# EAGLE board SparkFun_CAN-Bus_Shield_Panel_v13 (EAGLE 7.3.0), part 1 of 2
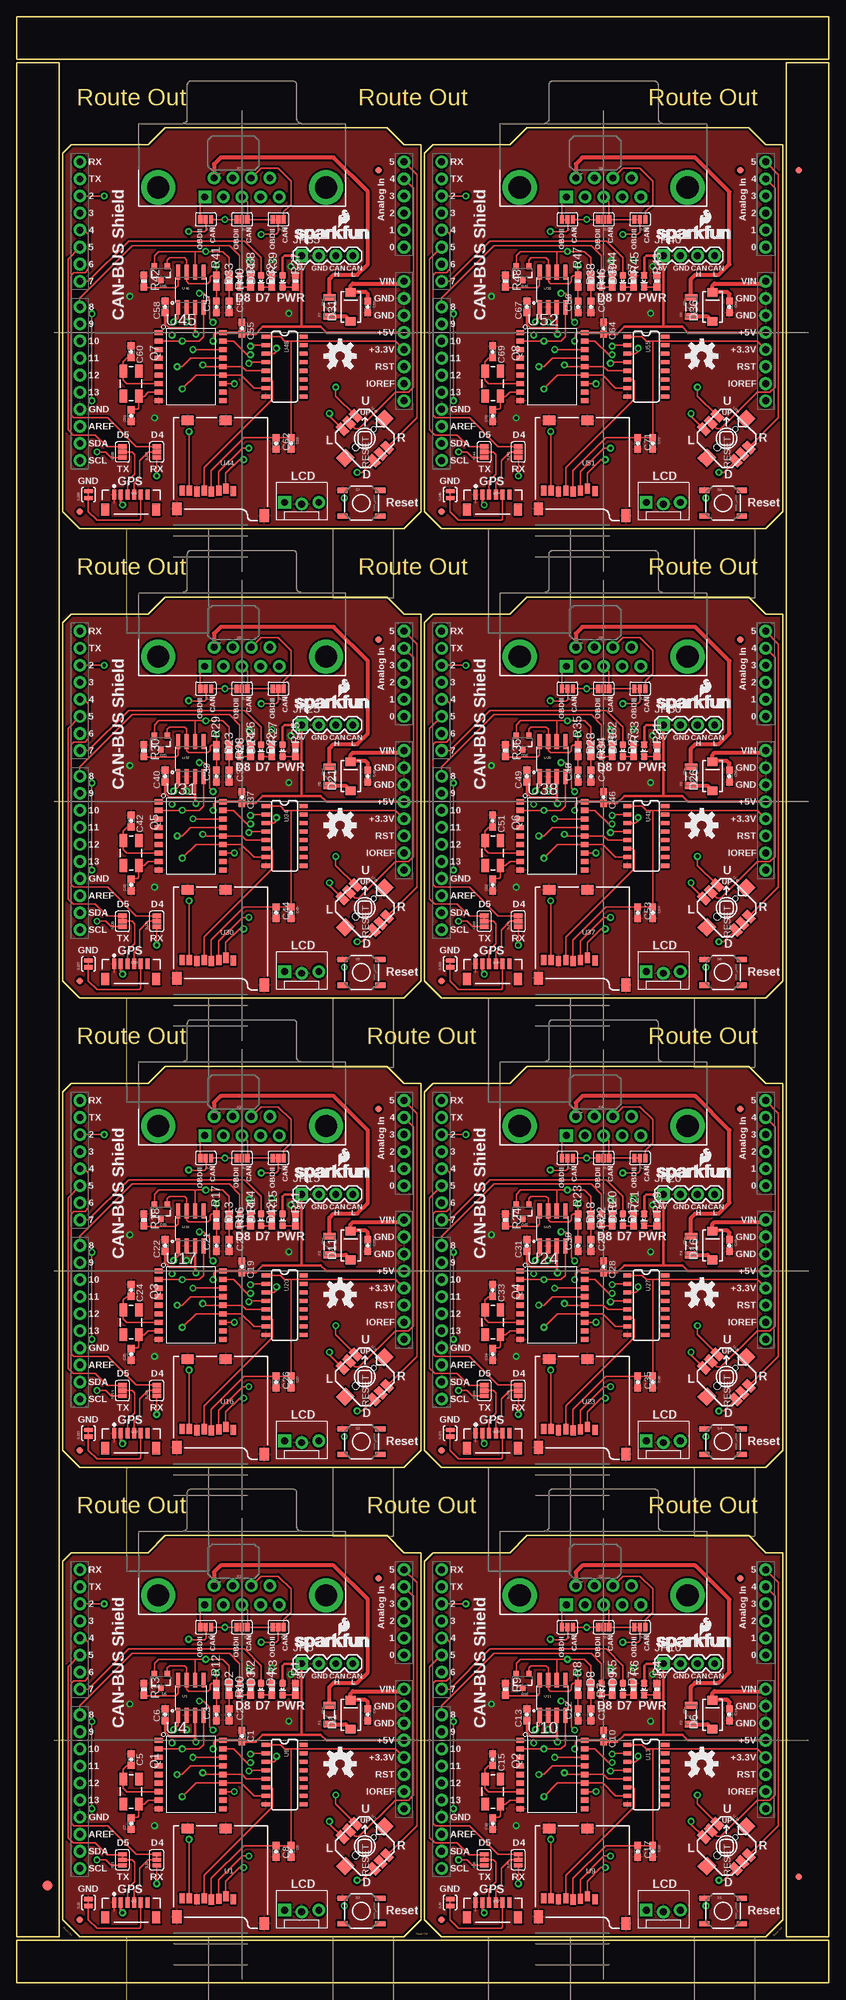
[diagram p0: board, top side]
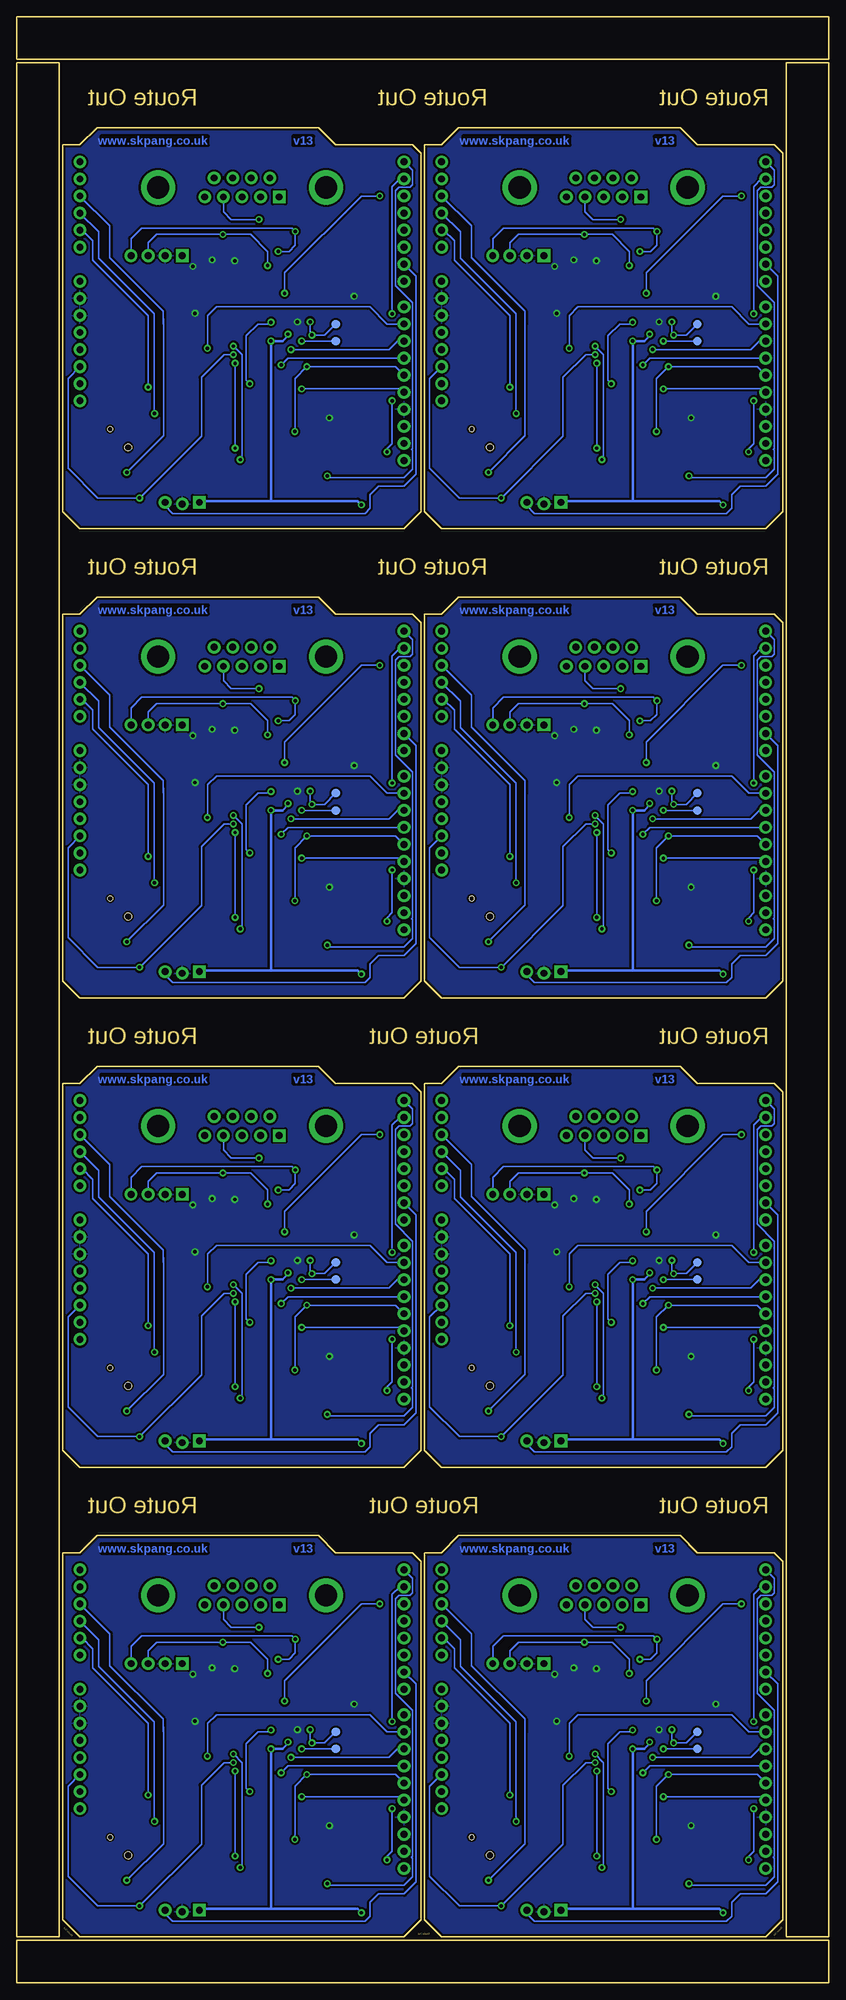
[diagram p1: board, bottom side, seen from below]

Size 120.9 x 292.61 mm. Coordinates in mm from the lower left corner, seen from the top.
Outline: 79.25,286.26 0,286.26 0,292.61 29.72,292.61
Outline: 25.91,292.61 120.9,292.61 120.9,286.26 75.44,286.26
Outline: 6.86,9.4 6.86,62.74 8.13,64.01 19.56,64.01 22.1,66.55 55.12,66.55 57.66,64.01 60.2,64.01 60.2,9.4 57.66,6.86 9.4,6.86 6.86,9.4
Outline: 60.71,9.4 60.71,62.74 61.98,64.01 73.41,64.01 75.95,66.55 108.97,66.55 111.51,64.01 114.05,64.01 114.05,9.4 111.51,6.86 63.25,6.86 60.71,9.4
Outline: 6.86,79.25 6.86,132.59 8.13,133.86 19.56,133.86 22.1,136.4 55.12,136.4 57.66,133.86 60.2,133.86 60.2,79.25 57.66,76.71 9.4,76.71 6.86,79.25
Outline: 60.71,79.25 60.71,132.59 61.98,133.86 73.41,133.86 75.95,136.4 108.97,136.4 111.51,133.86 114.05,133.86 114.05,79.25 111.51,76.71 63.25,76.71 60.71,79.25
Outline: 6.86,149.1 6.86,202.44 8.13,203.71 19.56,203.71 22.1,206.25 55.12,206.25 57.66,203.71 60.2,203.71 60.2,149.1 57.66,146.56 9.4,146.56 6.86,149.1
Outline: 60.71,149.1 60.71,202.44 61.98,203.71 73.41,203.71 75.95,206.25 108.97,206.25 111.51,203.71 114.05,203.71 114.05,149.1 111.51,146.56 63.25,146.56 60.71,149.1
Outline: 6.86,218.95 6.86,272.29 8.13,273.56 19.56,273.56 22.1,276.1 55.12,276.1 57.66,273.56 60.2,273.56 60.2,218.95 57.66,216.41 9.4,216.41 6.86,218.95
Outline: 60.71,218.95 60.71,272.29 61.98,273.56 73.41,273.56 75.95,276.1 108.97,276.1 111.51,273.56 114.05,273.56 114.05,218.95 111.51,216.41 63.25,216.41 60.71,218.95
Outline: 6.35,6.86 6.35,285.75 0,285.75 0,6.86 6.35,6.86
Outline: 0,0 120.9,0 120.9,6.35 0,6.35 0,0
Outline: 114.55,6.86 120.9,6.86 120.9,285.75 114.55,285.75 114.55,6.86
Copper layers (1*16): Top 0.035mm / dielectric 1.5mm / Bottom 0.035mm
Design rules "SparkFun-2-layer": minimum track width 7mil, minimum drill 15mil, track to track 8mil, track to pad 8mil, pad to pad 8mil, via to via 8mil, smd to smd 8mil, copper to edge 8mil, drill to drill 8mil, minimum pad ring 12mil, minimum via ring 10mil, stop-mask expansion 4mil, vias tented up to drill 20mil, thermal gap 10mil
tRestrict: area 24,41.1 to 25.6,42.1; area 22.4,25.6 to 29.4,26.9; area 28.8,36.1 to 29.1,36.4; area 41.1,25.9 to 41.5,26.2; area 77.9,41.1 to 79.4,42.1; area 76.3,25.6 to 83.2,26.9; area 82.6,36.1 to 82.9,36.4; area 95,25.9 to 95.3,26.2; area 24,111 to 25.6,112; area 22.4,95.4 to 29.4,96.7; area 28.8,105.9 to 29.1,106.2; area 41.1,95.8 to 41.5,96.1; area 77.9,111 to 79.4,112; area 76.3,95.4 to 83.2,96.7; area 82.6,105.9 to 82.9,106.2; area 95,95.8 to 95.3,96.1; area 24,180.8 to 25.6,181.8; area 22.4,165.3 to 29.4,166.6; area 28.8,175.8 to 29.1,176.1; area 41.1,165.6 to 41.5,165.9; area 77.9,180.8 to 79.4,181.8; area 76.3,165.3 to 83.2,166.6; area 82.6,175.8 to 82.9,176.1; area 95,165.6 to 95.3,165.9; area 24,250.7 to 25.6,251.7; area 22.4,235.1 to 29.4,236.4; area 28.8,245.6 to 29.1,245.9; area 41.1,235.5 to 41.5,235.8; area 77.9,250.7 to 79.4,251.7; area 76.3,235.1 to 83.2,236.4; area 82.6,245.6 to 82.9,245.9; area 95,235.5 to 95.3,235.8

## Footprints (pad centres in the part's own frame; a part is rotated, then mirrored left to right if it is on the bottom)
0603-CAP = smd 1.1 x 1: 1 -0.85,0; 2 0.85,0
SMA-DIODE = smd 1.27 x 1.47: A -2.15,0; C 2.15,0
LED-0603 = smd 1 x 1: A 0,-0.877; C 0,0.877
SOT23-3 = smd 0.8 x 0.9: 1 -0.95,-1; 2 0.95,-1; 3 0,1.1
FIDUCIAL-1.5X3 = smd 1.5 x 1.5: 1 0,0
FIDUCIAL-1X2 = smd 1 x 1: 1 0,0
PTC-1206 = smd 1 x 1.8: 1 -1.4,0; 2 1.4,0
MOLEX-1X3_LOCK = drill 1.016 pad 1.88 square: 1 0,0.127 | drill 1.016 pad 1.88: 2 2.54,-0.127; 3 5.08,0.127
1X04 = drill 1.016 pad 1.88 square: 1 0,0 | drill 1.016 pad 1.88: 2 2.54,0; 3 5.08,0; 4 7.62,0
CRYSTAL-SMD-5X3 = smd 1.9 x 1.1: 1 -1.85,-1.15; 2 1.85,-1.15; 3 1.85,1.15; 4 -1.85,1.15
0603-RES = smd 1.1 x 1: 1 -0.85,0; 2 0.85,0
TACTILE-SWITCH-SMD = smd 1.524 x 0.762: 1 -2.794,1.905; 2 2.794,1.905; 3 -2.794,-1.905; 4 2.794,-1.905
PAD-JUMPER-3-2OF3_NC_BY_TRACE_YES_SILK_FULL_BOX = smd 0.635 x 1.27: 1 -0.813,0; 2 0,0; 3 0.813,0
PAD-JUMPER-2-NC_BY_TRACE_YES_SILK = smd 0.635 x 1.27: 1 -0.508,0; 2 0.508,0
PAD.03X.05 = smd 1.27 x 1.27: P$1 0,0
MICROSD_1:1 = smd 0.8 x 1.5: 1 5.096,10.919; 2 6.218,10.519; 3 7.274,10.853; 4 8.367,10.982; 5 9.421,10.828; 6 10.539,10.973; 7 11.648,10.819; 8 12.721,10.819 | smd 1.8 x 1.4: CD1 11.92,0.4; CD2 6.22,0.4 | smd 1.4 x 1.9: GND1 0.497,14.55; GND3 13.52,13.55
UNO_R3_SHIELD = drill 1.016 pad 1.88: 3.3V 50.8,26.67; 5V 50.8,29.21; A0 50.8,41.91; A1 50.8,44.45; A2 50.8,46.99; A3 50.8,49.53; A4 50.8,52.07; A5 50.8,54.61; AREF 2.54,15.24; D2 2.54,49.53; D3 2.54,46.99; D4 2.54,44.45; D5 2.54,41.91; D6 2.54,39.37; D7 2.54,36.83; D8 2.54,33.02; D9 2.54,30.48; D10 2.54,27.94; D11 2.54,25.4; D12 2.54,22.86; D13 2.54,20.32; GND@0 50.8,31.75; GND@1 50.8,34.29; GND@2 2.54,17.78; IOREF 50.8,21.59; NC 50.8,19.05; RES 50.8,24.13; RX 2.54,54.61; SCL 2.54,10.16; SDA 2.54,12.7; TX 2.54,52.07; VIN 50.8,36.83
JST-6-SMD-VERT-1.0MM = smd 0.6 x 1.55: 1 -2.54,1.27; 2 -1.54,1.27; 3 -0.54,1.27; 4 0.46,1.27; 5 1.46,1.27; 6 2.46,1.27 | smd 1.2 x 1.8: P$1 -3.84,-0.955; P$2 3.76,-0.955
SO-18W = smd 0.762 x 1.143: 1 -5.08,-4.788; 2 -3.81,-4.788; 3 -2.54,-4.788; 4 -1.27,-4.788; 5 0,-4.788; 6 1.27,-4.788; 7 2.54,-4.788; 8 3.81,-4.788; 9 5.08,-4.788; 10 5.08,4.788; 11 3.81,4.788; 12 2.54,4.788; 13 1.27,4.788; 14 0,4.788; 15 -1.27,4.788; 16 -2.54,4.788; 17 -3.81,4.788; 18 -5.08,4.788
SO08 = smd 0.61 x 2.21: 1 -1.905,-2.616; 2 -0.635,-2.616; 3 0.635,-2.616; 4 1.905,-2.616; 5 1.905,2.616; 6 0.635,2.616; 7 -0.635,2.616; 8 -1.905,2.616
SO016 = smd 0.6 x 1.2: 1 -4.445,-2.8; 2 -3.175,-2.8; 3 -1.905,-2.8; 4 -0.635,-2.8; 5 0.635,-2.8; 6 1.905,-2.8; 7 3.175,-2.8; 8 4.445,-2.8; 9 4.445,2.8; 10 3.175,2.8; 11 1.905,2.8; 12 0.635,2.8; 13 -0.635,2.8; 14 -1.905,2.8; 15 -3.175,2.8; 16 -4.445,2.8
JOYSTICK_MINI = smd 1.85 x 1.1: A -3.325,1.4; B 3.325,1.4; C -3.325,-1.4; CTR -3.325,0; D 3.325,-1.4; GND 3.325,0 | smd 1.9 x 2: NC 0,4.13; NC@0 0,-4.13 | hole 0.75: 0,1.9 | hole 1.05: 0,-1.9
DB9_MALE = drill 1.016 pad 1.88: 1 5.54,-1.42; 2 2.77,-1.42; 3 0,-1.42; 4 -2.77,-1.42; 6 4.15,1.42; 7 1.38,1.42; 8 -1.38,1.42; 9 -4.15,1.42 | drill 1.016 pad 1.88 square: 5 -5.54,-1.42 | drill 3.302 pad 5.08: G1 -12.5,0; G2 12.5,0

## Placement (x,y rotation side)
C1  0.1uF  [0603-CAP]  33.53,36.7 270 top
C2  560pF  [0603-CAP]  31.62,39.88 90 top
C3  560pF  [0603-CAP]  29.72,39.88 90 top
C4  4.7uF  [0603-CAP]  52.26,39.88 270 top
C5  22pF  [0603-CAP]  17.02,33.21 270 top
C6  0.1uF  [0603-CAP]  22.1,39.88 270 top
C7  22pF  [0603-CAP]  17.02,23.69 90 top
C8  0.1uF  [0603-CAP]  38.61,19.56 90 top
C9  1.0uF  [0603-CAP]  40.83,19.56 270 top
C10  0.1uF  [0603-CAP]  87.38,36.7 270 top
C11  560pF  [0603-CAP]  85.47,39.88 90 top
C12  560pF  [0603-CAP]  83.57,39.88 90 top
C13  0.1uF  [0603-CAP]  75.95,39.88 270 top
C14  4.7uF  [0603-CAP]  106.11,39.88 270 top
C15  22pF  [0603-CAP]  70.87,33.21 270 top
C16  22pF  [0603-CAP]  70.87,23.69 90 top
C17  0.1uF  [0603-CAP]  92.46,19.56 90 top
C18  1.0uF  [0603-CAP]  94.68,19.56 270 top
C19  0.1uF  [0603-CAP]  33.53,106.55 270 top
C20  560pF  [0603-CAP]  31.62,109.73 90 top
C21  560pF  [0603-CAP]  29.72,109.73 90 top
C22  0.1uF  [0603-CAP]  22.1,109.73 270 top
C23  4.7uF  [0603-CAP]  52.26,109.73 270 top
C24  22pF  [0603-CAP]  17.02,103.06 270 top
C25  22pF  [0603-CAP]  17.02,93.54 90 top
C26  0.1uF  [0603-CAP]  38.61,89.41 90 top
C27  1.0uF  [0603-CAP]  40.83,89.41 270 top
C28  0.1uF  [0603-CAP]  87.38,106.55 270 top
C29  560pF  [0603-CAP]  85.47,109.73 90 top
C30  560pF  [0603-CAP]  83.57,109.73 90 top
C31  0.1uF  [0603-CAP]  75.95,109.73 270 top
C32  4.7uF  [0603-CAP]  106.11,109.73 270 top
C33  22pF  [0603-CAP]  70.87,103.06 270 top
C34  22pF  [0603-CAP]  70.87,93.54 90 top
C35  0.1uF  [0603-CAP]  92.46,89.41 90 top
C36  1.0uF  [0603-CAP]  94.68,89.41 270 top
C37  0.1uF  [0603-CAP]  33.53,176.4 270 top
C38  560pF  [0603-CAP]  31.62,179.58 90 top
C39  560pF  [0603-CAP]  29.72,179.58 90 top
C40  0.1uF  [0603-CAP]  22.1,179.58 270 top
C41  4.7uF  [0603-CAP]  52.26,179.58 270 top
C42  22pF  [0603-CAP]  17.02,172.91 270 top
C43  22pF  [0603-CAP]  17.02,163.39 90 top
C44  0.1uF  [0603-CAP]  38.61,159.26 90 top
C45  1.0uF  [0603-CAP]  40.83,159.26 270 top
C46  0.1uF  [0603-CAP]  87.38,176.4 270 top
C47  560pF  [0603-CAP]  85.47,179.58 90 top
C48  560pF  [0603-CAP]  83.57,179.58 90 top
C49  0.1uF  [0603-CAP]  75.95,179.58 270 top
C50  4.7uF  [0603-CAP]  106.11,179.58 270 top
C51  22pF  [0603-CAP]  70.87,172.91 270 top
C52  22pF  [0603-CAP]  70.87,163.39 90 top
C53  0.1uF  [0603-CAP]  92.46,159.26 90 top
C54  1.0uF  [0603-CAP]  94.68,159.26 270 top
C55  0.1uF  [0603-CAP]  33.53,246.25 270 top
C56  560pF  [0603-CAP]  31.62,249.43 90 top
C57  560pF  [0603-CAP]  29.72,249.43 90 top
C58  0.1uF  [0603-CAP]  22.1,249.43 270 top
C59  4.7uF  [0603-CAP]  52.26,249.43 270 top
C60  22pF  [0603-CAP]  17.02,242.76 270 top
C61  22pF  [0603-CAP]  17.02,233.24 90 top
C62  0.1uF  [0603-CAP]  38.61,229.11 90 top
C63  1.0uF  [0603-CAP]  40.83,229.11 270 top
C64  0.1uF  [0603-CAP]  87.38,246.25 270 top
C65  560pF  [0603-CAP]  85.47,249.43 90 top
C66  560pF  [0603-CAP]  83.57,249.43 90 top
C67  0.1uF  [0603-CAP]  75.95,249.43 270 top
C68  4.7uF  [0603-CAP]  106.11,249.43 270 top
C69  22pF  [0603-CAP]  70.87,242.76 270 top
C70  22pF  [0603-CAP]  70.87,233.24 90 top
C71  0.1uF  [0603-CAP]  92.46,229.11 90 top
C72  1.0uF  [0603-CAP]  94.68,229.11 270 top
D1  MBRA140  [SMA-DIODE]  49.72,39.88 90 top
D2  GREEN  [LED-0603]  33.21,43.69 180 top
D3  GREEN  [LED-0603]  36.39,43.69 180 top
D4  RED  [LED-0603]  39.56,43.69 180 top
D5  PESD1CAN  [SOT23-3]  21.46,44.96 180 top
D6  MBRA140  [SMA-DIODE]  103.57,39.88 90 top
D7  RED  [LED-0603]  93.41,43.69 180 top
D8  GREEN  [LED-0603]  87.06,43.69 180 top
D9  GREEN  [LED-0603]  90.23,43.69 180 top
D10  PESD1CAN  [SOT23-3]  75.31,44.96 180 top
D11  MBRA140  [SMA-DIODE]  49.72,109.73 90 top
D12  RED  [LED-0603]  39.56,113.54 180 top
D13  GREEN  [LED-0603]  33.21,113.54 180 top
D14  GREEN  [LED-0603]  36.39,113.54 180 top
D15  PESD1CAN  [SOT23-3]  21.46,114.81 180 top
D16  MBRA140  [SMA-DIODE]  103.57,109.73 90 top
D17  RED  [LED-0603]  93.41,113.54 180 top
D18  GREEN  [LED-0603]  87.06,113.54 180 top
D19  GREEN  [LED-0603]  90.23,113.54 180 top
D20  PESD1CAN  [SOT23-3]  75.31,114.81 180 top
D21  MBRA140  [SMA-DIODE]  49.72,179.58 90 top
D22  RED  [LED-0603]  39.56,183.39 180 top
D23  GREEN  [LED-0603]  33.21,183.39 180 top
D24  GREEN  [LED-0603]  36.39,183.39 180 top
D25  PESD1CAN  [SOT23-3]  21.46,184.66 180 top
D26  MBRA140  [SMA-DIODE]  103.57,179.58 90 top
D27  RED  [LED-0603]  93.41,183.39 180 top
D28  GREEN  [LED-0603]  87.06,183.39 180 top
D29  GREEN  [LED-0603]  90.23,183.39 180 top
D30  PESD1CAN  [SOT23-3]  75.31,184.66 180 top
D31  MBRA140  [SMA-DIODE]  49.72,249.43 90 top
D32  RED  [LED-0603]  39.56,253.24 180 top
D33  GREEN  [LED-0603]  33.21,253.24 180 top
D34  GREEN  [LED-0603]  36.39,253.24 180 top
D35  PESD1CAN  [SOT23-3]  21.46,254.51 180 top
D36  MBRA140  [SMA-DIODE]  103.57,249.43 90 top
D37  RED  [LED-0603]  93.41,253.24 180 top
D38  GREEN  [LED-0603]  87.06,253.24 180 top
D39  GREEN  [LED-0603]  90.23,253.24 180 top
D40  PESD1CAN  [SOT23-3]  75.31,254.51 180 top
E$1  [FIDUCIAL-1.5X3]  4.57,14.48 0 top
E$4  [FIDUCIAL-1X2]  116.46,15.75 0 top
E$5  [FIDUCIAL-1X2]  116.46,269.75 180 top
F1  [PTC-1206]  46.55,39.88 90 top
F2  [PTC-1206]  100.39,39.88 90 top
F3  [PTC-1206]  46.55,109.73 90 top
F4  [PTC-1206]  100.39,109.73 90 top
F5  [PTC-1206]  46.55,179.58 90 top
F6  [PTC-1206]  100.39,179.58 90 top
F7  [PTC-1206]  46.55,249.43 90 top
F8  [PTC-1206]  100.39,249.43 90 top
JP1  DNP  [MOLEX-1X3_LOCK]  39.88,10.67 0 top
JP2  FIDUCIAL1X2  [FIDUCIAL-1X2]  9.4,9.4 0 top
JP3  FIDUCIAL1X2  [FIDUCIAL-1X2]  53.85,60.2 0 top
JP4  SFE_LOGO_NAME_FLAME.1_INCH  [SFE_LOGO_NAME_FLAME_.1]  41.02,49.09 0 top
JP5  DNP  [1X04]  42.42,47.5 0 top
JP6  FIDUCIAL1X2  [FIDUCIAL-1X2]  63.25,9.4 0 top
JP7  FIDUCIAL1X2  [FIDUCIAL-1X2]  107.7,60.2 0 top
JP8  DNP  [MOLEX-1X3_LOCK]  93.73,10.67 0 top
JP9  SFE_LOGO_NAME_FLAME.1_INCH  [SFE_LOGO_NAME_FLAME_.1]  94.87,49.09 0 top
JP10  DNP  [1X04]  96.27,47.5 0 top
JP11  FIDUCIAL1X2  [FIDUCIAL-1X2]  9.4,79.25 0 top
JP12  FIDUCIAL1X2  [FIDUCIAL-1X2]  53.85,130.05 0 top
JP13  DNP  [MOLEX-1X3_LOCK]  39.88,80.52 0 top
JP14  SFE_LOGO_NAME_FLAME.1_INCH  [SFE_LOGO_NAME_FLAME_.1]  41.02,118.94 0 top
JP15  DNP  [1X04]  42.42,117.35 0 top
JP16  FIDUCIAL1X2  [FIDUCIAL-1X2]  63.25,79.25 0 top
JP17  FIDUCIAL1X2  [FIDUCIAL-1X2]  107.7,130.05 0 top
JP18  DNP  [MOLEX-1X3_LOCK]  93.73,80.52 0 top
JP19  SFE_LOGO_NAME_FLAME.1_INCH  [SFE_LOGO_NAME_FLAME_.1]  94.87,118.94 0 top
JP20  DNP  [1X04]  96.27,117.35 0 top
JP21  FIDUCIAL1X2  [FIDUCIAL-1X2]  9.4,149.1 0 top
JP22  FIDUCIAL1X2  [FIDUCIAL-1X2]  53.85,199.9 0 top
JP23  DNP  [MOLEX-1X3_LOCK]  39.88,150.37 0 top
JP24  SFE_LOGO_NAME_FLAME.1_INCH  [SFE_LOGO_NAME_FLAME_.1]  41.02,188.79 0 top
JP25  DNP  [1X04]  42.42,187.2 0 top
JP26  FIDUCIAL1X2  [FIDUCIAL-1X2]  63.25,149.1 0 top
JP27  FIDUCIAL1X2  [FIDUCIAL-1X2]  107.7,199.9 0 top
JP28  DNP  [MOLEX-1X3_LOCK]  93.73,150.37 0 top
JP29  SFE_LOGO_NAME_FLAME.1_INCH  [SFE_LOGO_NAME_FLAME_.1]  94.87,188.79 0 top
JP30  DNP  [1X04]  96.27,187.2 0 top
JP31  FIDUCIAL1X2  [FIDUCIAL-1X2]  9.4,218.95 0 top
JP32  FIDUCIAL1X2  [FIDUCIAL-1X2]  53.85,269.75 0 top
JP33  DNP  [MOLEX-1X3_LOCK]  39.88,220.22 0 top
JP34  SFE_LOGO_NAME_FLAME.1_INCH  [SFE_LOGO_NAME_FLAME_.1]  41.02,258.64 0 top
JP35  DNP  [1X04]  42.42,257.05 0 top
JP36  FIDUCIAL1X2  [FIDUCIAL-1X2]  63.25,218.95 0 top
JP37  FIDUCIAL1X2  [FIDUCIAL-1X2]  107.7,269.75 0 top
JP38  DNP  [MOLEX-1X3_LOCK]  93.73,220.22 0 top
JP39  SFE_LOGO_NAME_FLAME.1_INCH  [SFE_LOGO_NAME_FLAME_.1]  94.87,258.64 0 top
JP40  DNP  [1X04]  96.27,257.05 0 top
LOGO1  OSHW-LOGOM  [OSHW-LOGO-M]  48.13,32.58 0 top
LOGO2  OSHW-LOGOM  [OSHW-LOGO-M]  101.98,32.58 0 top
LOGO3  OSHW-LOGOM  [OSHW-LOGO-M]  48.13,102.43 0 top
LOGO4  OSHW-LOGOM  [OSHW-LOGO-M]  101.98,102.43 0 top
LOGO5  OSHW-LOGOM  [OSHW-LOGO-M]  48.13,172.28 0 top
LOGO6  OSHW-LOGOM  [OSHW-LOGO-M]  101.98,172.28 0 top
LOGO7  OSHW-LOGOM  [OSHW-LOGO-M]  48.13,242.13 0 top
LOGO8  OSHW-LOGOM  [OSHW-LOGO-M]  101.98,242.13 0 top
Q1  16MHz  [CRYSTAL-SMD-5X3]  17.02,28.45 270 top
Q2  16MHz  [CRYSTAL-SMD-5X3]  70.87,28.45 270 top
Q3  16MHz  [CRYSTAL-SMD-5X3]  17.02,98.3 270 top
Q4  16MHz  [CRYSTAL-SMD-5X3]  70.87,98.3 270 top
Q5  16MHz  [CRYSTAL-SMD-5X3]  17.02,168.15 270 top
Q6  16MHz  [CRYSTAL-SMD-5X3]  70.87,168.15 270 top
Q7  16MHz  [CRYSTAL-SMD-5X3]  17.02,238 270 top
Q8  16MHz  [CRYSTAL-SMD-5X3]  70.87,238 270 top
R1  1K  [0603-RES]  41.47,43.69 270 top
R2  1K  [0603-RES]  34.8,43.69 270 top
R3  1K  [0603-RES]  37.97,43.69 270 top
R4  1K  [0603-RES]  95.31,43.69 270 top
R5  1K  [0603-RES]  88.65,43.69 270 top
R6  1K  [0603-RES]  91.82,43.69 270 top
R7  100  [0603-RES]  85.47,43.69 90 top
R8  100  [0603-RES]  83.57,43.69 90 top
R9  4.7K  [0603-RES]  72.77,43.69 270 top
R10  100  [0603-RES]  31.62,43.69 90 top
R11  1K  [0603-RES]  41.47,113.54 270 top
R12  100  [0603-RES]  29.72,43.69 90 top
R13  4.7K  [0603-RES]  18.92,43.69 270 top
R14  1K  [0603-RES]  34.8,113.54 270 top
R15  1K  [0603-RES]  37.97,113.54 270 top
R16  100  [0603-RES]  31.62,113.54 90 top
R17  100  [0603-RES]  29.72,113.54 90 top
R18  4.7K  [0603-RES]  18.92,113.54 270 top
R19  1K  [0603-RES]  95.31,113.54 270 top
R20  1K  [0603-RES]  88.65,113.54 270 top
R21  1K  [0603-RES]  91.82,113.54 270 top
R22  100  [0603-RES]  85.47,113.54 90 top
R23  100  [0603-RES]  83.57,113.54 90 top
R24  4.7K  [0603-RES]  72.77,113.54 270 top
R25  1K  [0603-RES]  41.47,183.39 270 top
R26  1K  [0603-RES]  34.8,183.39 270 top
R27  1K  [0603-RES]  37.97,183.39 270 top
R28  100  [0603-RES]  31.62,183.39 90 top
R29  100  [0603-RES]  29.72,183.39 90 top
R30  4.7K  [0603-RES]  18.92,183.39 270 top
R31  1K  [0603-RES]  95.31,183.39 270 top
R32  1K  [0603-RES]  88.65,183.39 270 top
R33  1K  [0603-RES]  91.82,183.39 270 top
R34  100  [0603-RES]  85.47,183.39 90 top
R35  100  [0603-RES]  83.57,183.39 90 top
R36  4.7K  [0603-RES]  72.77,183.39 270 top
R37  1K  [0603-RES]  41.47,253.24 270 top
R38  1K  [0603-RES]  34.8,253.24 270 top
R39  1K  [0603-RES]  37.97,253.24 270 top
R40  100  [0603-RES]  31.62,253.24 90 top
R41  100  [0603-RES]  29.72,253.24 90 top
R42  4.7K  [0603-RES]  18.92,253.24 270 top
R43  1K  [0603-RES]  95.31,253.24 270 top
R44  1K  [0603-RES]  88.65,253.24 270 top
R45  1K  [0603-RES]  91.82,253.24 270 top
R46  100  [0603-RES]  85.47,253.24 90 top
R47  100  [0603-RES]  83.57,253.24 90 top
R48  4.7K  [0603-RES]  72.77,253.24 270 top
S1  RESET  [TACTILE-SWITCH-SMD]  105.16,10.67 0 top
S2  RESET  [TACTILE-SWITCH-SMD]  51.31,10.67 0 top
S3  RESET  [TACTILE-SWITCH-SMD]  51.31,80.52 0 top
S4  RESET  [TACTILE-SWITCH-SMD]  105.16,80.52 0 top
S5  RESET  [TACTILE-SWITCH-SMD]  51.31,150.37 0 top
S6  RESET  [TACTILE-SWITCH-SMD]  105.16,150.37 0 top
S7  RESET  [TACTILE-SWITCH-SMD]  51.31,220.22 0 top
S8  RESET  [TACTILE-SWITCH-SMD]  105.16,220.22 0 top
SJ1  JUMPER-PAD-3-2OF3_NC_BY_TRACE_SMALL  [PAD-JUMPER-3-2OF3_NC_BY_TRACE_YES_SILK_FULL_BOX]  15.75,18.29 90 top
SJ2  JUMPER-PAD-3-2OF3_NC_BY_TRACE_SMALL  [PAD-JUMPER-3-2OF3_NC_BY_TRACE_YES_SILK_FULL_BOX]  20.83,18.29 90 top
SJ3  JUMPER-PAD-2-NC_BY_TRACE  [PAD-JUMPER-2-NC_BY_TRACE_YES_SILK]  10.67,11.94 90 top
SJ4  JUMPER-PAD-3-2OF3_NC_BY_TRACE_SMALL  [PAD-JUMPER-3-2OF3_NC_BY_TRACE_YES_SILK_FULL_BOX]  38.93,52.9 180 top
SJ5  JUMPER-PAD-3-2OF3_NC_BY_TRACE_SMALL  [PAD-JUMPER-3-2OF3_NC_BY_TRACE_YES_SILK_FULL_BOX]  33.53,52.9 180 top
SJ6  JUMPER-PAD-3-2OF3_NC_BY_TRACE_SMALL  [PAD-JUMPER-3-2OF3_NC_BY_TRACE_YES_SILK_FULL_BOX]  28.13,52.9 180 top
SJ7  JUMPER-PAD-3-2OF3_NC_BY_TRACE_SMALL  [PAD-JUMPER-3-2OF3_NC_BY_TRACE_YES_SILK_FULL_BOX]  74.68,18.29 90 top
SJ8  JUMPER-PAD-3-2OF3_NC_BY_TRACE_SMALL  [PAD-JUMPER-3-2OF3_NC_BY_TRACE_YES_SILK_FULL_BOX]  69.6,18.29 90 top
SJ9  JUMPER-PAD-2-NC_BY_TRACE  [PAD-JUMPER-2-NC_BY_TRACE_YES_SILK]  64.52,11.94 90 top
SJ10  JUMPER-PAD-3-2OF3_NC_BY_TRACE_SMALL  [PAD-JUMPER-3-2OF3_NC_BY_TRACE_YES_SILK_FULL_BOX]  92.77,52.9 180 top
SJ11  JUMPER-PAD-3-2OF3_NC_BY_TRACE_SMALL  [PAD-JUMPER-3-2OF3_NC_BY_TRACE_YES_SILK_FULL_BOX]  87.38,52.9 180 top
SJ12  JUMPER-PAD-3-2OF3_NC_BY_TRACE_SMALL  [PAD-JUMPER-3-2OF3_NC_BY_TRACE_YES_SILK_FULL_BOX]  81.98,52.9 180 top
SJ13  JUMPER-PAD-3-2OF3_NC_BY_TRACE_SMALL  [PAD-JUMPER-3-2OF3_NC_BY_TRACE_YES_SILK_FULL_BOX]  20.83,88.14 90 top
SJ14  JUMPER-PAD-3-2OF3_NC_BY_TRACE_SMALL  [PAD-JUMPER-3-2OF3_NC_BY_TRACE_YES_SILK_FULL_BOX]  15.75,88.14 90 top
SJ15  JUMPER-PAD-2-NC_BY_TRACE  [PAD-JUMPER-2-NC_BY_TRACE_YES_SILK]  10.67,81.79 90 top
SJ16  JUMPER-PAD-3-2OF3_NC_BY_TRACE_SMALL  [PAD-JUMPER-3-2OF3_NC_BY_TRACE_YES_SILK_FULL_BOX]  38.93,122.75 180 top
SJ17  JUMPER-PAD-3-2OF3_NC_BY_TRACE_SMALL  [PAD-JUMPER-3-2OF3_NC_BY_TRACE_YES_SILK_FULL_BOX]  33.53,122.75 180 top
SJ18  JUMPER-PAD-3-2OF3_NC_BY_TRACE_SMALL  [PAD-JUMPER-3-2OF3_NC_BY_TRACE_YES_SILK_FULL_BOX]  28.13,122.75 180 top
SJ19  JUMPER-PAD-3-2OF3_NC_BY_TRACE_SMALL  [PAD-JUMPER-3-2OF3_NC_BY_TRACE_YES_SILK_FULL_BOX]  74.68,88.14 90 top
SJ20  JUMPER-PAD-3-2OF3_NC_BY_TRACE_SMALL  [PAD-JUMPER-3-2OF3_NC_BY_TRACE_YES_SILK_FULL_BOX]  69.6,88.14 90 top
SJ21  JUMPER-PAD-2-NC_BY_TRACE  [PAD-JUMPER-2-NC_BY_TRACE_YES_SILK]  64.52,81.79 90 top
SJ22  JUMPER-PAD-3-2OF3_NC_BY_TRACE_SMALL  [PAD-JUMPER-3-2OF3_NC_BY_TRACE_YES_SILK_FULL_BOX]  92.77,122.75 180 top
SJ23  JUMPER-PAD-3-2OF3_NC_BY_TRACE_SMALL  [PAD-JUMPER-3-2OF3_NC_BY_TRACE_YES_SILK_FULL_BOX]  87.38,122.75 180 top
SJ24  JUMPER-PAD-3-2OF3_NC_BY_TRACE_SMALL  [PAD-JUMPER-3-2OF3_NC_BY_TRACE_YES_SILK_FULL_BOX]  81.98,122.75 180 top
SJ25  JUMPER-PAD-3-2OF3_NC_BY_TRACE_SMALL  [PAD-JUMPER-3-2OF3_NC_BY_TRACE_YES_SILK_FULL_BOX]  20.83,157.99 90 top
SJ26  JUMPER-PAD-3-2OF3_NC_BY_TRACE_SMALL  [PAD-JUMPER-3-2OF3_NC_BY_TRACE_YES_SILK_FULL_BOX]  15.75,157.99 90 top
SJ27  JUMPER-PAD-2-NC_BY_TRACE  [PAD-JUMPER-2-NC_BY_TRACE_YES_SILK]  10.67,151.64 90 top
SJ28  JUMPER-PAD-3-2OF3_NC_BY_TRACE_SMALL  [PAD-JUMPER-3-2OF3_NC_BY_TRACE_YES_SILK_FULL_BOX]  38.93,192.6 180 top
SJ29  JUMPER-PAD-3-2OF3_NC_BY_TRACE_SMALL  [PAD-JUMPER-3-2OF3_NC_BY_TRACE_YES_SILK_FULL_BOX]  33.53,192.6 180 top
SJ30  JUMPER-PAD-3-2OF3_NC_BY_TRACE_SMALL  [PAD-JUMPER-3-2OF3_NC_BY_TRACE_YES_SILK_FULL_BOX]  28.13,192.6 180 top
SJ31  JUMPER-PAD-3-2OF3_NC_BY_TRACE_SMALL  [PAD-JUMPER-3-2OF3_NC_BY_TRACE_YES_SILK_FULL_BOX]  74.68,157.99 90 top
SJ32  JUMPER-PAD-3-2OF3_NC_BY_TRACE_SMALL  [PAD-JUMPER-3-2OF3_NC_BY_TRACE_YES_SILK_FULL_BOX]  69.6,157.99 90 top
SJ33  JUMPER-PAD-2-NC_BY_TRACE  [PAD-JUMPER-2-NC_BY_TRACE_YES_SILK]  64.52,151.64 90 top
SJ34  JUMPER-PAD-3-2OF3_NC_BY_TRACE_SMALL  [PAD-JUMPER-3-2OF3_NC_BY_TRACE_YES_SILK_FULL_BOX]  92.77,192.6 180 top
SJ35  JUMPER-PAD-3-2OF3_NC_BY_TRACE_SMALL  [PAD-JUMPER-3-2OF3_NC_BY_TRACE_YES_SILK_FULL_BOX]  87.38,192.6 180 top
SJ36  JUMPER-PAD-3-2OF3_NC_BY_TRACE_SMALL  [PAD-JUMPER-3-2OF3_NC_BY_TRACE_YES_SILK_FULL_BOX]  81.98,192.6 180 top
SJ37  JUMPER-PAD-3-2OF3_NC_BY_TRACE_SMALL  [PAD-JUMPER-3-2OF3_NC_BY_TRACE_YES_SILK_FULL_BOX]  20.83,227.84 90 top
SJ38  JUMPER-PAD-3-2OF3_NC_BY_TRACE_SMALL  [PAD-JUMPER-3-2OF3_NC_BY_TRACE_YES_SILK_FULL_BOX]  15.75,227.84 90 top
SJ39  JUMPER-PAD-2-NC_BY_TRACE  [PAD-JUMPER-2-NC_BY_TRACE_YES_SILK]  10.67,221.49 90 top
SJ40  JUMPER-PAD-3-2OF3_NC_BY_TRACE_SMALL  [PAD-JUMPER-3-2OF3_NC_BY_TRACE_YES_SILK_FULL_BOX]  38.93,262.45 180 top
SJ41  JUMPER-PAD-3-2OF3_NC_BY_TRACE_SMALL  [PAD-JUMPER-3-2OF3_NC_BY_TRACE_YES_SILK_FULL_BOX]  33.53,262.45 180 top
SJ42  JUMPER-PAD-3-2OF3_NC_BY_TRACE_SMALL  [PAD-JUMPER-3-2OF3_NC_BY_TRACE_YES_SILK_FULL_BOX]  28.13,262.45 180 top
SJ43  JUMPER-PAD-3-2OF3_NC_BY_TRACE_SMALL  [PAD-JUMPER-3-2OF3_NC_BY_TRACE_YES_SILK_FULL_BOX]  74.68,227.84 90 top
SJ44  JUMPER-PAD-3-2OF3_NC_BY_TRACE_SMALL  [PAD-JUMPER-3-2OF3_NC_BY_TRACE_YES_SILK_FULL_BOX]  69.6,227.84 90 top
SJ45  JUMPER-PAD-2-NC_BY_TRACE  [PAD-JUMPER-2-NC_BY_TRACE_YES_SILK]  64.52,221.49 90 top
SJ46  JUMPER-PAD-3-2OF3_NC_BY_TRACE_SMALL  [PAD-JUMPER-3-2OF3_NC_BY_TRACE_YES_SILK_FULL_BOX]  92.77,262.45 180 top
SJ47  JUMPER-PAD-3-2OF3_NC_BY_TRACE_SMALL  [PAD-JUMPER-3-2OF3_NC_BY_TRACE_YES_SILK_FULL_BOX]  87.38,262.45 180 top
SJ48  JUMPER-PAD-3-2OF3_NC_BY_TRACE_SMALL  [PAD-JUMPER-3-2OF3_NC_BY_TRACE_YES_SILK_FULL_BOX]  81.98,262.45 180 top
TP1  TEST-POINT3X5  [PAD.03X.05]  19.56,34.8 0 bottom
TP2  TEST-POINT3X5  [PAD.03X.05]  19.56,37.34 0 bottom
TP3  TEST-POINT3X5  [PAD.03X.05]  73.41,34.8 0 bottom
TP4  TEST-POINT3X5  [PAD.03X.05]  73.41,37.34 0 bottom
TP5  TEST-POINT3X5  [PAD.03X.05]  19.56,104.65 0 bottom
TP6  TEST-POINT3X5  [PAD.03X.05]  19.56,107.19 0 bottom
TP7  TEST-POINT3X5  [PAD.03X.05]  73.41,104.65 0 bottom
TP8  TEST-POINT3X5  [PAD.03X.05]  73.41,107.19 0 bottom
TP9  TEST-POINT3X5  [PAD.03X.05]  19.56,174.5 0 bottom
TP10  TEST-POINT3X5  [PAD.03X.05]  19.56,177.04 0 bottom
TP11  TEST-POINT3X5  [PAD.03X.05]  73.41,174.5 0 bottom
TP12  TEST-POINT3X5  [PAD.03X.05]  73.41,177.04 0 bottom
TP13  TEST-POINT3X5  [PAD.03X.05]  19.56,244.35 0 bottom
TP14  TEST-POINT3X5  [PAD.03X.05]  19.56,246.89 0 bottom
TP15  TEST-POINT3X5  [PAD.03X.05]  73.41,244.35 0 bottom
TP16  TEST-POINT3X5  [PAD.03X.05]  73.41,246.89 0 bottom
U1  USD-SOCKET  [MICROSD_1:1]  37.34,23.37 180 top
U2  ARDUINO_R3_SHIELD  [UNO_R3_SHIELD]  6.86,6.86 0 top
U3  JST_VERTICAL  [JST-6-SMD-VERT-1.0MM]  17.02,10.67 0 top
U4  MCP2515  [SO-18W]  25.91,30.99 270 top
U5  MCP2551  [SO08]  25.91,42.42 0 top
U6  HEX_CONVERTER  [SO016]  39.88,30.99 270 top
U7  [JOYSTICK_MINI]  51.82,20.32 315 top
U8  ARDUINO_R3_SHIELD  [UNO_R3_SHIELD]  60.71,6.86 0 top
U9  USD-SOCKET  [MICROSD_1:1]  91.19,23.37 180 top
U10  MCP2515  [SO-18W]  79.76,30.99 270 top
U11  MCP2551  [SO08]  79.76,42.42 0 top
U12  JST_VERTICAL  [JST-6-SMD-VERT-1.0MM]  70.87,10.67 0 top
U13  HEX_CONVERTER  [SO016]  93.73,30.99 270 top
U14  [JOYSTICK_MINI]  105.66,20.32 315 top
U15  ARDUINO_R3_SHIELD  [UNO_R3_SHIELD]  6.86,76.71 0 top
U16  USD-SOCKET  [MICROSD_1:1]  37.34,93.22 180 top
U17  MCP2515  [SO-18W]  25.91,100.84 270 top
U18  MCP2551  [SO08]  25.91,112.27 0 top
U19  JST_VERTICAL  [JST-6-SMD-VERT-1.0MM]  17.02,80.52 0 top
U20  HEX_CONVERTER  [SO016]  39.88,100.84 270 top
U21  [JOYSTICK_MINI]  51.82,90.17 315 top
U22  ARDUINO_R3_SHIELD  [UNO_R3_SHIELD]  60.71,76.71 0 top
U23  USD-SOCKET  [MICROSD_1:1]  91.19,93.22 180 top
U24  MCP2515  [SO-18W]  79.76,100.84 270 top
U25  MCP2551  [SO08]  79.76,112.27 0 top
U26  JST_VERTICAL  [JST-6-SMD-VERT-1.0MM]  70.87,80.52 0 top
U27  HEX_CONVERTER  [SO016]  93.73,100.84 270 top
U28  [JOYSTICK_MINI]  105.66,90.17 315 top
U29  ARDUINO_R3_SHIELD  [UNO_R3_SHIELD]  6.86,146.56 0 top
U30  USD-SOCKET  [MICROSD_1:1]  37.34,163.07 180 top
U31  MCP2515  [SO-18W]  25.91,170.69 270 top
U32  MCP2551  [SO08]  25.91,182.12 0 top
U33  JST_VERTICAL  [JST-6-SMD-VERT-1.0MM]  17.02,150.37 0 top
U34  HEX_CONVERTER  [SO016]  39.88,170.69 270 top
U35  [JOYSTICK_MINI]  51.82,160.02 315 top
U36  ARDUINO_R3_SHIELD  [UNO_R3_SHIELD]  60.71,146.56 0 top
U37  USD-SOCKET  [MICROSD_1:1]  91.19,163.07 180 top
U38  MCP2515  [SO-18W]  79.76,170.69 270 top
U39  MCP2551  [SO08]  79.76,182.12 0 top
U40  JST_VERTICAL  [JST-6-SMD-VERT-1.0MM]  70.87,150.37 0 top
U41  HEX_CONVERTER  [SO016]  93.73,170.69 270 top
U42  [JOYSTICK_MINI]  105.66,160.02 315 top
U43  ARDUINO_R3_SHIELD  [UNO_R3_SHIELD]  6.86,216.41 0 top
U44  USD-SOCKET  [MICROSD_1:1]  37.34,232.92 180 top
U45  MCP2515  [SO-18W]  25.91,240.54 270 top
U46  MCP2551  [SO08]  25.91,251.97 0 top
U47  JST_VERTICAL  [JST-6-SMD-VERT-1.0MM]  17.02,220.22 0 top
U48  HEX_CONVERTER  [SO016]  39.88,240.54 270 top
U49  [JOYSTICK_MINI]  51.82,229.87 315 top
U50  ARDUINO_R3_SHIELD  [UNO_R3_SHIELD]  60.71,216.41 0 top
U51  USD-SOCKET  [MICROSD_1:1]  91.19,232.92 180 top
U52  MCP2515  [SO-18W]  79.76,240.54 270 top
U53  MCP2551  [SO08]  79.76,251.97 0 top
U54  JST_VERTICAL  [JST-6-SMD-VERT-1.0MM]  70.87,220.22 0 top
U55  HEX_CONVERTER  [SO016]  93.73,240.54 270 top
U56  [JOYSTICK_MINI]  105.66,229.87 315 top
X1  DB9 Plug  [DB9_MALE]  33.53,57.66 0 top
X2  DB9 Plug  [DB9_MALE]  87.38,57.66 0 top
X3  DB9 Plug  [DB9_MALE]  33.53,127.51 0 top
X4  DB9 Plug  [DB9_MALE]  87.38,127.51 0 top
X5  DB9 Plug  [DB9_MALE]  33.53,197.36 0 top
X6  DB9 Plug  [DB9_MALE]  87.38,197.36 0 top
X7  DB9 Plug  [DB9_MALE]  33.53,267.21 0 top
X8  DB9 Plug  [DB9_MALE]  87.38,267.21 0 top

## Library data of the parts
C1 C6 C8 C10 C13 C17 C19 C22 C26 C28 C31 C35 C37 C40 C44 C46 C49 C53 C55 C58 C62 C64 C67 C71 = SparkFun-Capacitors; PROD_ID: CAP-00810
C2 C3 C11 C12 C20 C21 C29 C30 C38 C39 C47 C48 C56 C57 C65 C66 = SparkFun-Capacitors; PROD_ID: CAP-08749
C4 C14 C23 C32 C41 C50 C59 C68 = SparkFun-Capacitors; PROD_ID: CAP-08280
C5 C7 C15 C16 C24 C25 C33 C34 C42 C43 C51 C52 C60 C61 C69 C70 = SparkFun-Capacitors; PROD_ID: CAP-07876
C9 C18 C27 C36 C45 C54 C63 C72 = SparkFun-Capacitors; PROD_ID: CAP-00868
D1 D6 D11 D16 D21 D26 D31 D36 = SparkFun-DiscreteSemi; PROD_ID: DIO-08053
D2 D3 D8 D9 D13 D14 D18 D19 D23 D24 D28 D29 D33 D34 D38 D39 = SparkFun-LED; PROD_ID: DIO-00821
D4 D7 D12 D17 D22 D27 D32 D37 = SparkFun-LED; PROD_ID: DIO-00819
D5 D10 D15 D20 D25 D30 D35 D40 = SparkFun-DiscreteSemi; PROD_ID: DIO-12501
E$1 = SparkFun-Retired
E$4 E$5 JP2-JP4 JP6 JP7 JP9 JP11 JP12 JP14 JP16 JP17 JP19 JP21 JP22 JP24 JP26 JP27 JP29 JP31 JP32 JP34 JP36 JP37 JP39 LOGO1-LOGO8 = SparkFun-Aesthetics
F1-F8 = SparkFun-PowerIC; PROD_ID: RES-08585
JP1 JP5 JP8 JP10 JP13 JP15 JP18 JP20 JP23 JP25 JP28 JP30 JP33 JP35 JP38 JP40 = SparkFun-Connectors
Q1-Q8 = SparkFun-FreqCtrl; PROD_ID: XTAL-08218
R1-R6 R11 R14 R15 R19-R21 R25-R27 R31-R33 R37-R39 R43-R45 = SparkFun-Resistors; PROD_ID: RES-07856
R7 R8 R10 R12 R16 R17 R22 R23 R28 R29 R34 R35 R40 R41 R46 R47 = SparkFun-Resistors; PROD_ID: RES-07863
R9 R13 R18 R24 R30 R36 R42 R48 = SparkFun-Resistors; PROD_ID: RES-07857
S1-S8 = SparkFun-Electromechanical; PROD_ID: SWCH-08247
SJ1-SJ48 TP1-TP16 = SparkFun-Passives
U1 U9 U16 U23 U30 U37 U44 U51 = SparkFun-Connectors; PROD_ID: CONN-07820
U2 U8 U15 U22 U29 U36 U43 U50 = SparkFun-Boards
U3 U12 U19 U26 U33 U40 U47 U54 = SparkFun-Connectors; PROD_ID: CONN-08249
U4 U10 U17 U24 U31 U38 U45 U52 = SparkFun-DigitalIC; PROD_ID: IC-09906
U5 U11 U18 U25 U32 U39 U46 U53 = SparkFun-DigitalIC; PROD_ID: IC-09907
U6 U13 U20 U27 U34 U41 U48 U55 = SparkFun-DigitalIC; PROD_ID: IC-09604
U7 U14 U21 U28 U35 U42 U49 U56 = SparkFun-Electromechanical; PROD_ID: SWCH-09905
X1-X8 = SparkFun-Connectors; PROD_ID: CONN-09904

## Nets
3.3V: C8.2 C9.1 U1.4 U2.3.3V U6.1
3.3V1: C17.2 C18.1 U8.3.3V U9.4 U13.1
3.3V2: C26.2 C27.1 U15.3.3V U16.4 U20.1
3.3V3: C35.2 C36.1 U22.3.3V U23.4 U27.1
3.3V4: C44.2 C45.1 U29.3.3V U30.4 U34.1
3.3V5: C53.2 C54.1 U36.3.3V U37.4 U41.1
3.3V6: C62.2 C63.1 U43.3.3V U44.4 U48.1
3.3V7: C71.2 C72.1 U50.3.3V U51.4 U55.1
5V: C1.2 C6.2 D4.A JP1.1 JP5.1 U2.5V U3.2 U4.18 U5.3
5V1: C10.2 C13.2 D7.A JP8.1 JP10.1 U8.5V U10.18 U11.3 U12.2
5V2: C19.2 C22.2 D12.A JP13.1 JP15.1 U15.5V U17.18 U18.3 U19.2
5V3: C28.2 C31.2 D17.A JP18.1 JP20.1 U22.5V U24.18 U25.3 U26.2
5V4: C37.2 C40.2 D22.A JP23.1 JP25.1 U29.5V U31.18 U32.3 U33.2
5V5: C46.2 C49.2 D27.A JP28.1 JP30.1 U36.5V U38.18 U39.3 U40.2
5V6: C55.2 C58.2 D32.A JP33.1 JP35.1 U43.5V U45.18 U46.3 U47.2
5V7: C64.2 C67.2 D37.A JP38.1 JP40.1 U50.5V U52.18 U53.3 U54.2
12V: C4.1 D1.C U2.VIN
12V1: C14.1 D6.C U8.VIN
12V2: C23.1 D11.C U15.VIN
12V3: C32.1 D16.C U22.VIN
12V4: C41.1 D21.C U29.VIN
12V5: C50.1 D26.C U36.VIN
12V6: C59.1 D31.C U43.VIN
12V7: C68.1 D36.C U50.VIN
A0: U2.A0
A1: U8.A0
A2: U15.A0
A3: U22.A0
A4: U29.A0
A5: U36.A0
A6: U43.A0
A7: U50.A0
AREF: U2.AREF
AREF1: U8.AREF
AREF2: U15.AREF
AREF3: U22.AREF
AREF4: U29.AREF
AREF5: U36.AREF
AREF6: U43.AREF
AREF7: U50.AREF
CAN_CS: U2.D10 U4.16
CAN_CS1: U8.D10 U10.16
CAN_CS2: U15.D10 U17.16
CAN_CS3: U22.D10 U24.16
CAN_CS4: U29.D10 U31.16
CAN_CS5: U36.D10 U38.16
CAN_CS6: U43.D10 U45.16
CAN_CS7: U50.D10 U52.16
CAN_INT: U2.D2 U4.12
CAN_INT1: U8.D2 U10.12
CAN_INT2: U15.D2 U17.12
CAN_INT3: U22.D2 U24.12
CAN_INT4: U29.D2 U31.12
CAN_INT5: U36.D2 U38.12
CAN_INT6: U43.D2 U45.12
CAN_INT7: U50.D2 U52.12
CAN_RXD: TP1.P$1 U4.2 U5.4
CAN_RXD1: TP3.P$1 U10.2 U11.4
CAN_RXD2: TP5.P$1 U17.2 U18.4
CAN_RXD3: TP7.P$1 U24.2 U25.4
CAN_RXD4: TP9.P$1 U31.2 U32.4
CAN_RXD5: TP11.P$1 U38.2 U39.4
CAN_RXD6: TP13.P$1 U45.2 U46.4
CAN_RXD7: TP15.P$1 U52.2 U53.4
CAN_TXD: TP2.P$1 U4.1 U5.1
CAN_TXD1: TP4.P$1 U10.1 U11.1
CAN_TXD2: TP6.P$1 U17.1 U18.1
CAN_TXD3: TP8.P$1 U24.1 U25.1
CAN_TXD4: TP10.P$1 U31.1 U32.1
CAN_TXD5: TP12.P$1 U38.1 U39.1
CAN_TXD6: TP14.P$1 U45.1 U46.1
CAN_TXD7: TP16.P$1 U52.1 U53.1
CANH: D5.1 JP5.3 R12.2 SJ4.2 U5.7
CANH1: D10.1 JP10.3 R8.2 SJ10.2 U11.7
CANH2: D15.1 JP15.3 R17.2 SJ16.2 U18.7
CANH3: D20.1 JP20.3 R23.2 SJ22.2 U25.7
CANH4: D25.1 JP25.3 R29.2 SJ28.2 U32.7
CANH5: D30.1 JP30.3 R35.2 SJ34.2 U39.7
CANH6: D35.1 JP35.3 R41.2 SJ40.2 U46.7
CANH7: D40.1 JP40.3 R47.2 SJ46.2 U53.7
CANL: D5.2 JP5.4 R10.2 SJ6.2 U5.6
CANL1: D10.2 JP10.4 R7.2 SJ12.2 U11.6
CANL2: D15.2 JP15.4 R16.2 SJ18.2 U18.6
CANL3: D20.2 JP20.4 R22.2 SJ24.2 U25.6
CANL4: D25.2 JP25.4 R28.2 SJ30.2 U32.6
CANL5: D30.2 JP30.4 R34.2 SJ36.2 U39.6
CANL6: D35.2 JP35.4 R40.2 SJ42.2 U46.6
CANL7: D40.2 JP40.4 R46.2 SJ48.2 U53.6
D1: SJ7.3 U8.D4
D2: SJ8.3 U8.D5
D3: U2.D3
D4: SJ2.3 U2.D4
D5: SJ1.3 U2.D5
D6: U8.D3
D7: SJ13.3 U15.D4
D8: SJ14.3 U15.D5
D9: U15.D3
D10: SJ19.3 U22.D4
D11: SJ20.3 U22.D5
D12: U22.D3
D13: SJ25.3 U29.D4
D14: SJ26.3 U29.D5
D15: U29.D3
D16: SJ31.3 U36.D4
D17: SJ32.3 U36.D5
D18: U36.D3
D19: SJ37.3 U43.D4
D20: SJ38.3 U43.D5
D21: U43.D3
D22: SJ43.3 U50.D4
D23: SJ44.3 U50.D5
D24: U50.D3
GND: C1.1 C2.1 C3.1 C4.2 C5.1 C6.1 C7.1 C8.1 C9.2 D5.3 JP1.2 JP5.2 R1.1 R2.1 R3.1 R13.1 S2.1 SJ3.2 SJ5.2 U1.6 U1.CD1 U1.CD2 U1.GND1 U1.GND3 U2.GND@0 U2.GND@1 U2.GND@2 U3.1 U4.9 U5.2 U6.8 U7.GND
GND1: C10.1 C11.1 C12.1 C13.1 C14.2 C15.1 C16.1 C17.1 C18.2 D10.3 JP8.2 JP10.2 R4.1 R5.1 R6.1 R9.1 S1.1 SJ9.2 SJ11.2 U8.GND@0 U8.GND@1 U8.GND@2 U9.6 U9.CD1 U9.CD2 U9.GND1 U9.GND3 U10.9 U11.2 U12.1 U13.8 U14.GND
GND2: C19.1 C20.1 C21.1 C22.1 C23.2 C24.1 C25.1 C26.1 C27.2 D15.3 JP13.2 JP15.2 R11.1 R14.1 R15.1 R18.1 S3.1 SJ15.2 SJ17.2 U15.GND@0 U15.GND@1 U15.GND@2 U16.6 U16.CD1 U16.CD2 U16.GND1 U16.GND3 U17.9 U18.2 U19.1 U20.8 U21.GND
GND3: C28.1 C29.1 C30.1 C31.1 C32.2 C33.1 C34.1 C35.1 C36.2 D20.3 JP18.2 JP20.2 R19.1 R20.1 R21.1 R24.1 S4.1 SJ21.2 SJ23.2 U22.GND@0 U22.GND@1 U22.GND@2 U23.6 U23.CD1 U23.CD2 U23.GND1 U23.GND3 U24.9 U25.2 U26.1 U27.8 U28.GND
GND4: C37.1 C38.1 C39.1 C40.1 C41.2 C42.1 C43.1 C44.1 C45.2 D25.3 JP23.2 JP25.2 R25.1 R26.1 R27.1 R30.1 S5.1 SJ27.2 SJ29.2 U29.GND@0 U29.GND@1 U29.GND@2 U30.6 U30.CD1 U30.CD2 U30.GND1 U30.GND3 U31.9 U32.2 U33.1 U34.8 U35.GND
GND5: C46.1 C47.1 C48.1 C49.1 C50.2 C51.1 C52.1 C53.1 C54.2 D30.3 JP28.2 JP30.2 R31.1 R32.1 R33.1 R36.1 S6.1 SJ33.2 SJ35.2 U36.GND@0 U36.GND@1 U36.GND@2 U37.6 U37.CD1 U37.CD2 U37.GND1 U37.GND3 U38.9 U39.2 U40.1 U41.8 U42.GND
GND6: C55.1 C56.1 C57.1 C58.1 C59.2 C60.1 C61.1 C62.1 C63.2 D35.3 JP33.2 JP35.2 R37.1 R38.1 R39.1 R42.1 S7.1 SJ39.2 SJ41.2 U43.GND@0 U43.GND@1 U43.GND@2 U44.6 U44.CD1 U44.CD2 U44.GND1 U44.GND3 U45.9 U46.2 U47.1 U48.8 U49.GND
GND7: C64.1 C65.1 C66.1 C67.1 C68.2 C69.1 C70.1 C71.1 C72.2 D40.3 JP38.2 JP40.2 R43.1 R44.1 R45.1 R48.1 S8.1 SJ45.2 SJ47.2 U50.GND@0 U50.GND@1 U50.GND@2 U51.6 U51.CD1 U51.CD2 U51.GND1 U51.GND3 U52.9 U53.2 U54.1 U55.8 U56.GND
JOY-CLICK: U2.A4 U7.CTR
JOY-CLICK1: U8.A4 U14.CTR
JOY-CLICK2: U15.A4 U21.CTR
JOY-CLICK3: U22.A4 U28.CTR
JOY-CLICK4: U29.A4 U35.CTR
JOY-CLICK5: U36.A4 U42.CTR
JOY-CLICK6: U43.A4 U49.CTR
JOY-CLICK7: U50.A4 U56.CTR
JOY-DOWN: U2.A3 U7.D
JOY-DOWN1: U8.A3 U14.D
JOY-DOWN2: U15.A3 U21.D
JOY-DOWN3: U22.A3 U28.D
JOY-DOWN4: U29.A3 U35.D
JOY-DOWN5: U36.A3 U42.D
JOY-DOWN6: U43.A3 U49.D
JOY-DOWN7: U50.A3 U56.D
JOY-LEFT: U2.A2 U7.C
JOY-LEFT1: U8.A2 U14.C
JOY-LEFT2: U15.A2 U21.C
JOY-LEFT3: U22.A2 U28.C
JOY-LEFT4: U29.A2 U35.C
JOY-LEFT5: U36.A2 U42.C
JOY-LEFT6: U43.A2 U49.C
JOY-LEFT7: U50.A2 U56.C
JOY-RIGHT: U2.A5 U7.B
JOY-RIGHT1: U8.A5 U14.B
JOY-RIGHT2: U15.A5 U21.B
JOY-RIGHT3: U22.A5 U28.B
JOY-RIGHT4: U29.A5 U35.B
JOY-RIGHT5: U36.A5 U42.B
JOY-RIGHT6: U43.A5 U49.B
JOY-RIGHT7: U50.A5 U56.B
JOY-UP: U2.A1 U7.A
JOY-UP1: U8.A1 U14.A
JOY-UP2: U15.A1 U21.A
JOY-UP3: U22.A1 U28.A
JOY-UP4: U29.A1 U35.A
JOY-UP5: U36.A1 U42.A
JOY-UP6: U43.A1 U49.A
JOY-UP7: U50.A1 U56.A
LCD: JP1.3 U2.D6
LCD1: JP8.3 U8.D6
LCD2: JP13.3 U15.D6
LCD3: JP18.3 U22.D6
LCD4: JP23.3 U29.D6
LCD5: JP28.3 U36.D6
LCD6: JP33.3 U43.D6
LCD7: JP38.3 U50.D6
LED1: D2.A U2.D8
LED2: D3.A U2.D7
LED3: D8.A U8.D8
LED4: D9.A U8.D7
LED5: D13.A U15.D8
LED6: D14.A U15.D7
LED7: D18.A U22.D8
LED8: D19.A U22.D7
LED9: D23.A U29.D8
LED10: D24.A U29.D7
LED11: D28.A U36.D8
LED12: D29.A U36.D7
LED13: D33.A U43.D8
LED14: D34.A U43.D7
LED15: D38.A U50.D8
LED16: D39.A U50.D7
MISO: U1.7 U2.D12 U4.15
MISO1: U8.D12 U9.7 U10.15
MISO2: U15.D12 U16.7 U17.15
MISO3: U22.D12 U23.7 U24.15
MISO4: U29.D12 U30.7 U31.15
MISO5: U36.D12 U37.7 U38.15
MISO6: U43.D12 U44.7 U45.15
MISO7: U50.D12 U51.7 U52.15
MOSI: U2.D11 U4.14 U6.5
MOSI1: U8.D11 U10.14 U13.5
MOSI2: U15.D11 U17.14 U20.5
MOSI3: U22.D11 U24.14 U27.5
MOSI4: U29.D11 U31.14 U34.5
MOSI5: U36.D11 U38.14 U41.5
MOSI6: U43.D11 U45.14 U48.5
MOSI7: U50.D11 U52.14 U55.5
N$1: SJ3.1 U3.5
N$2: SJ6.3 X1.5
N$3: D8.C R5.2
N$4: D4.C R1.2
N$5: D2.C R2.2
N$6: D3.C R3.2
N$7: D9.C R6.2
N$8: C11.2 R7.1
N$9: C2.2 R10.1
N$10: C3.2 R12.1
N$11: C12.2 R8.1
N$12: R9.2 U11.8
N$13: F1.2 X1.9
N$14: R13.2 U5.8
N$15: U1.2 U6.2
N$16: D1.A F1.1
N$17: C7.2 Q1.3 U4.8
N$18: C5.2 Q1.1 U4.7
N$19: U1.3 U6.4
N$20: F2.2 X2.9
N$21: SJ1.2 U3.3
N$22: SJ2.2 U3.4
N$23: D6.A F2.1
N$24: U1.5 U6.6
N$25: C16.2 Q2.3 U10.8
N$26: C15.2 Q2.1 U10.7
N$27: SJ8.2 U12.3
N$28: SJ7.2 U12.4
N$29: D7.C R4.2
N$30: U9.2 U13.2
N$31: U9.3 U13.4
N$32: U9.5 U13.6
N$33: SJ9.1 U12.5
N$34: SJ12.3 X2.5
N$35: D13.C R14.2
N$36: D14.C R15.2
N$37: C20.2 R16.1
N$38: C21.2 R17.1
N$39: R18.2 U18.8
N$40: F3.2 X3.9
N$41: D11.A F3.1
N$42: C25.2 Q3.3 U17.8
N$43: C24.2 Q3.1 U17.7
N$44: SJ14.2 U19.3
N$45: SJ13.2 U19.4
N$46: D12.C R11.2
N$47: U16.2 U20.2
N$48: U16.3 U20.4
N$49: U16.5 U20.6
N$50: SJ15.1 U19.5
N$51: SJ18.3 X3.5
N$52: D18.C R20.2
N$53: D19.C R21.2
N$54: C29.2 R22.1
N$55: C30.2 R23.1
N$56: R24.2 U25.8
N$57: F4.2 X4.9
N$58: D16.A F4.1
N$59: C34.2 Q4.3 U24.8
N$60: C33.2 Q4.1 U24.7
N$61: SJ20.2 U26.3
N$62: SJ19.2 U26.4
N$63: D17.C R19.2
N$64: U23.2 U27.2
N$65: U23.3 U27.4
N$66: U23.5 U27.6
N$67: SJ21.1 U26.5
N$68: SJ24.3 X4.5
N$69: D23.C R26.2
N$70: D24.C R27.2
N$71: C38.2 R28.1
N$72: C39.2 R29.1
N$73: R30.2 U32.8
N$74: F5.2 X5.9
N$75: D21.A F5.1
N$76: C43.2 Q5.3 U31.8
N$77: C42.2 Q5.1 U31.7
N$78: SJ26.2 U33.3
N$79: SJ25.2 U33.4
N$80: D22.C R25.2
N$81: U30.2 U34.2
N$82: U30.3 U34.4
N$83: U30.5 U34.6
N$84: SJ27.1 U33.5
N$85: SJ30.3 X5.5
N$86: D28.C R32.2
N$87: D29.C R33.2
N$88: C47.2 R34.1
N$89: C48.2 R35.1
N$90: R36.2 U39.8
N$91: F6.2 X6.9
N$92: D26.A F6.1
N$93: C52.2 Q6.3 U38.8
N$94: C51.2 Q6.1 U38.7
N$95: SJ32.2 U40.3
N$96: SJ31.2 U40.4
N$97: D27.C R31.2
N$98: U37.2 U41.2
N$99: U37.3 U41.4
N$100: U37.5 U41.6
N$101: SJ33.1 U40.5
N$102: SJ36.3 X6.5
N$103: D33.C R38.2
N$104: D34.C R39.2
N$105: C56.2 R40.1
N$106: C57.2 R41.1
N$107: R42.2 U46.8
N$108: F7.2 X7.9
N$109: D31.A F7.1
N$110: C61.2 Q7.3 U45.8
N$111: C60.2 Q7.1 U45.7
N$112: SJ38.2 U47.3
N$113: SJ37.2 U47.4
N$114: D32.C R37.2
N$115: U44.2 U48.2
N$116: U44.3 U48.4
N$117: U44.5 U48.6
N$118: SJ39.1 U47.5
N$119: SJ42.3 X7.5
N$120: D38.C R44.2
N$121: D39.C R45.2
N$122: C65.2 R46.1
N$123: C66.2 R47.1
N$124: R48.2 U53.8
N$125: F8.2 X8.9
N$126: D36.A F8.1
N$127: C70.2 Q8.3 U52.8
N$128: C69.2 Q8.1 U52.7
N$129: SJ44.2 U54.3
N$130: SJ43.2 U54.4
N$131: D37.C R43.2
N$132: U51.2 U55.2
N$133: U51.3 U55.4
N$134: U51.5 U55.6
N$135: SJ45.1 U54.5
N$136: SJ48.3 X8.5
NC1: X1.1
NC2: X1.4
NC3: X1.6
NC4: X2.1
NC5: X1.8
NC6: X2.6
NC7: X2.8
NC8: X2.4
NC9: X3.1
NC10: X3.6
NC11: X3.8
NC12: X3.4
NC13: X4.1
NC14: X4.6
NC15: X4.8
NC16: X4.4
NC17: X5.1
NC18: X5.6
NC19: X5.8
NC20: X5.4
NC21: X6.1
NC22: X6.6
NC23: X6.8
NC24: X6.4
NC25: X7.1
NC26: X7.6
NC27: X7.8
NC28: X7.4
NC29: X8.1
NC30: X8.6
NC31: X8.8
NC32: X8.4
PIN1: SJ10.3 SJ11.1 X2.3
PIN2: SJ5.3 SJ6.1 X1.2
PIN3: SJ4.3 SJ5.1 X1.3
PIN4: SJ10.1 X2.7
PIN5: SJ11.3 SJ12.1 X2.2
PIN6: SJ16.3 SJ17.1 X3.3
PIN7: SJ4.1 X1.7
PIN8: SJ16.1 X3.7
PIN9: SJ17.3 SJ18.1 X3.2
PIN10: SJ22.3 SJ23.1 X4.3
PIN11: SJ22.1 X4.7
PIN12: SJ23.3 SJ24.1 X4.2
PIN13: SJ28.3 SJ29.1 X5.3
PIN14: SJ28.1 X5.7
PIN15: SJ29.3 SJ30.1 X5.2
PIN16: SJ34.3 SJ35.1 X6.3
PIN17: SJ34.1 X6.7
PIN18: SJ35.3 SJ36.1 X6.2
PIN19: SJ40.3 SJ41.1 X7.3
PIN20: SJ40.1 X7.7
PIN21: SJ41.3 SJ42.1 X7.2
PIN22: SJ46.3 SJ47.1 X8.3
PIN23: SJ46.1 X8.7
PIN24: SJ47.3 SJ48.1 X8.2
RS: S2.3 U2.RES U4.17
RS1: S1.3 U8.RES U10.17
RS2: S3.3 U15.RES U17.17
RS3: S4.3 U22.RES U24.17
RS4: S5.3 U29.RES U31.17
RS5: S6.3 U36.RES U38.17
RS6: S7.3 U43.RES U45.17
RS7: S8.3 U50.RES U52.17
RX: SJ2.1 U2.RX
RX1: SJ7.1 U8.RX
RX2: SJ13.1 U15.RX
RX3: SJ19.1 U22.RX
RX4: SJ25.1 U29.RX
RX5: SJ31.1 U36.RX
RX6: SJ37.1 U43.RX
RX7: SJ43.1 U50.RX
SCK: U2.D13 U4.13 U6.7
SCK1: U8.D13 U10.13 U13.7
SCK2: U15.D13 U17.13 U20.7
SCK3: U22.D13 U24.13 U27.7
SCK4: U29.D13 U31.13 U34.7
SCK5: U36.D13 U38.13 U41.7
SCK6: U43.D13 U45.13 U48.7
SCK7: U50.D13 U52.13 U55.7
SD_CS: U2.D9 U6.3
SD_CS1: U8.D9 U13.3
SD_CS2: U15.D9 U20.3
SD_CS3: U22.D9 U27.3
SD_CS4: U29.D9 U34.3
SD_CS5: U36.D9 U41.3
SD_CS6: U43.D9 U48.3
SD_CS7: U50.D9 U55.3
TX: SJ1.1 U2.TX
TX1: SJ8.1 U8.TX
TX2: SJ14.1 U15.TX
TX3: SJ20.1 U22.TX
TX4: SJ26.1 U29.TX
TX5: SJ32.1 U36.TX
TX6: SJ38.1 U43.TX
TX7: SJ44.1 U50.TX

## Tracks (layer width: path | path; a pad name or v marks a point on that pad's centre or on a via)
3.3V
  Top 0.254: U6.1 39.24,35.43 39.88,34.8 40.83,34.8 | 40.83,34.8 56.39,34.8 U2.3.3V | 40.83,34.8 C9.1 C8.2 33.87,20.41 28.97,15.51 U1.4
3.3V1
  Top 0.254: U13.1 93.09,35.43 93.73,34.8 94.68,34.8 | 94.68,34.8 110.24,34.8 U8.3.3V | 94.68,34.8 C18.1 C17.2 87.72,20.41 82.82,15.51 U9.4
3.3V2
  Top 0.254: U20.1 39.24,105.28 39.88,104.65 40.83,104.65 | 40.83,104.65 56.39,104.65 U15.3.3V | 40.83,104.65 C27.1 C26.2 33.87,90.26 28.97,85.36 U16.4
3.3V3
  Top 0.254: U27.1 93.09,105.28 93.73,104.65 94.68,104.65 | 94.68,104.65 110.24,104.65 U22.3.3V | 94.68,104.65 C36.1 C35.2 87.72,90.26 82.82,85.36 U23.4
3.3V4
  Top 0.254: U34.1 39.24,175.13 39.88,174.5 40.83,174.5 | 40.83,174.5 56.39,174.5 U29.3.3V | 40.83,174.5 C45.1 C44.2 33.87,160.11 28.97,155.21 U30.4
3.3V5
  Top 0.254: U41.1 93.09,175.13 93.73,174.5 94.68,174.5 | 94.68,174.5 110.24,174.5 U36.3.3V | 94.68,174.5 C54.1 C53.2 87.72,160.11 82.82,155.21 U37.4
3.3V6
  Top 0.254: U48.1 39.24,244.98 39.88,244.35 40.83,244.35 | 40.83,244.35 56.39,244.35 U43.3.3V | 40.83,244.35 C63.1 C62.2 33.87,229.96 28.97,225.06 U44.4
3.3V7
  Top 0.254: U55.1 93.09,244.98 93.73,244.35 94.68,244.35 | 94.68,244.35 110.24,244.35 U50.3.3V | 94.68,244.35 C72.1 C71.2 87.72,229.96 82.82,225.06 U51.4
5V  (via drill 0.51)
  Top 0.254: U4.18 30.73,36.07 | D4.A 39.48,44.56 | 26.48,36.32 26.54,36.39
  Top 0.406: C6.2 22.1,37.34 22.73,36.7 26.54,36.7 | 42.42,36.92 45.25,36.92 46.1,36.07 U2.5V | v15.75,10.41 15.48,10.68 U3.2 | 42.42,36.92 JP5.1 39.88,47.5 39.56,47.18 D4.A | U5.3 26.54,36.7 | 26.54,36.7 26.54,36.39 26.54,35.94 v26.67,35.81 | v29.21,34.8 29.4,34.99 29.4,35.75 29.72,36.07 U4.18 33.31,36.07 C1.2 35.53,35.85 36.6,36.92 42.42,36.92
  Bottom 0.406: JP1.1 39.69,10.99 29.08,10.99 | 29.08,10.99 16.32,10.99 v15.75,10.41 | 29.08,10.99 29.21,11.11 v29.21,34.8 27.5,34.8 26.67,35.62 v26.67,35.81
5V1  (via drill 0.51)
  Top 0.254: U10.18 84.58,36.07 | D7.A 93.33,44.56 | 80.33,36.32 80.39,36.39
  Top 0.406: C13.2 75.95,37.34 76.58,36.7 80.39,36.7 | 96.27,36.92 99.1,36.92 99.95,36.07 U8.5V | v69.6,10.41 69.33,10.68 U12.2 | 96.27,36.92 JP10.1 93.73,47.5 93.41,47.18 D7.A | U11.3 80.39,36.7 | 80.39,36.7 80.39,36.39 80.39,35.94 v80.52,35.81 | v83.06,34.8 83.25,34.99 83.25,35.75 83.57,36.07 U10.18 87.16,36.07 C10.2 89.38,35.85 90.45,36.92 96.27,36.92
  Bottom 0.406: JP8.1 93.53,10.99 82.93,10.99 | 82.93,10.99 70.17,10.99 v69.6,10.41 | 82.93,10.99 83.06,11.11 v83.06,34.8 81.34,34.8 80.52,35.62 v80.52,35.81
5V2  (via drill 0.51)
  Top 0.254: U17.18 30.73,105.92 | D12.A 39.48,114.42 | 26.48,106.17 26.54,106.24
  Top 0.406: C22.2 22.1,107.19 22.73,106.55 26.54,106.55 | 42.42,106.77 45.25,106.77 46.1,105.92 U15.5V | v15.75,80.26 15.48,80.53 U19.2 | 42.42,106.77 JP15.1 39.88,117.35 39.56,117.03 D12.A | U18.3 26.54,106.55 | 26.54,106.55 26.54,106.24 26.54,105.79 v26.67,105.66 | v29.21,104.65 29.4,104.84 29.4,105.6 29.72,105.92 U17.18 33.31,105.92 C19.2 35.53,105.7 36.6,106.77 42.42,106.77
  Bottom 0.406: JP13.1 39.69,80.83 29.08,80.83 | 29.08,80.83 16.32,80.83 v15.75,80.26 | 29.08,80.83 29.21,80.96 v29.21,104.65 27.5,104.65 26.67,105.47 v26.67,105.66
5V3  (via drill 0.51)
  Top 0.254: U24.18 84.58,105.92 | D17.A 93.33,114.42 | 80.33,106.17 80.39,106.24
  Top 0.406: C31.2 75.95,107.19 76.58,106.55 80.39,106.55 | 96.27,106.77 99.1,106.77 99.95,105.92 U22.5V | v69.6,80.26 69.33,80.53 U26.2 | 96.27,106.77 JP20.1 93.73,117.35 93.41,117.03 D17.A | U25.3 80.39,106.55 | 80.39,106.55 80.39,106.24 80.39,105.79 v80.52,105.66 | v83.06,104.65 83.25,104.84 83.25,105.6 83.57,105.92 U24.18 87.16,105.92 C28.2 89.38,105.7 90.45,106.77 96.27,106.77
  Bottom 0.406: JP18.1 93.53,80.83 82.93,80.83 | 82.93,80.83 70.17,80.83 v69.6,80.26 | 82.93,80.83 83.06,80.96 v83.06,104.65 81.34,104.65 80.52,105.47 v80.52,105.66
5V4  (via drill 0.51)
  Top 0.254: U31.18 30.73,175.77 | D22.A 39.48,184.26 | 26.48,176.02 26.54,176.09
  Top 0.406: C40.2 22.1,177.04 22.73,176.4 26.54,176.4 | 42.42,176.62 45.25,176.62 46.1,175.77 U29.5V | v15.75,150.11 15.48,150.38 U33.2 | 42.42,176.62 JP25.1 39.88,187.2 39.56,186.88 D22.A | U32.3 26.54,176.4 | 26.54,176.4 26.54,176.09 26.54,175.64 v26.67,175.51 | v29.21,174.5 29.4,174.69 29.4,175.45 29.72,175.77 U31.18 33.31,175.77 C37.2 35.53,175.55 36.6,176.62 42.42,176.62
  Bottom 0.406: JP23.1 39.69,150.69 29.08,150.69 | 29.08,150.69 16.32,150.69 v15.75,150.11 | 29.08,150.69 29.21,150.81 v29.21,174.5 27.5,174.5 26.67,175.32 v26.67,175.51
5V5  (via drill 0.51)
  Top 0.254: U38.18 84.58,175.77 | D27.A 93.33,184.26 | 80.33,176.02 80.39,176.09
  Top 0.406: C49.2 75.95,177.04 76.58,176.4 80.39,176.4 | 96.27,176.62 99.1,176.62 99.95,175.77 U36.5V | v69.6,150.11 69.33,150.38 U40.2 | 96.27,176.62 JP30.1 93.73,187.2 93.41,186.88 D27.A | U39.3 80.39,176.4 | 80.39,176.4 80.39,176.09 80.39,175.64 v80.52,175.51 | v83.06,174.5 83.25,174.69 83.25,175.45 83.57,175.77 U38.18 87.16,175.77 C46.2 89.38,175.55 90.45,176.62 96.27,176.62
  Bottom 0.406: JP28.1 93.53,150.69 82.93,150.69 | 82.93,150.69 70.17,150.69 v69.6,150.11 | 82.93,150.69 83.06,150.81 v83.06,174.5 81.34,174.5 80.52,175.32 v80.52,175.51
5V6  (via drill 0.51)
  Top 0.254: U45.18 30.73,245.62 | D32.A 39.48,254.12 | 26.48,245.87 26.54,245.94
  Top 0.406: C58.2 22.1,246.89 22.73,246.25 26.54,246.25 | 42.42,246.47 45.25,246.47 46.1,245.62 U43.5V | v15.75,219.96 15.48,220.23 U47.2 | 42.42,246.47 JP35.1 39.88,257.05 39.56,256.73 D32.A | U46.3 26.54,246.25 | 26.54,246.25 26.54,245.94 26.54,245.49 v26.67,245.36 | v29.21,244.35 29.4,244.54 29.4,245.3 29.72,245.62 U45.18 33.31,245.62 C55.2 35.53,245.4 36.6,246.47 42.42,246.47
  Bottom 0.406: JP33.1 39.69,220.54 29.08,220.54 | 29.08,220.54 16.32,220.54 v15.75,219.96 | 29.08,220.54 29.21,220.66 v29.21,244.35 27.5,244.35 26.67,245.17 v26.67,245.36
5V7  (via drill 0.51)
  Top 0.254: U52.18 84.58,245.62 | D37.A 93.33,254.12 | 80.33,245.87 80.39,245.94
  Top 0.406: C67.2 75.95,246.89 76.58,246.25 80.39,246.25 | 96.27,246.47 99.1,246.47 99.95,245.62 U50.5V | v69.6,219.96 69.33,220.23 U54.2 | 96.27,246.47 JP40.1 93.73,257.05 93.41,256.73 D37.A | U53.3 80.39,246.25 | 80.39,246.25 80.39,245.94 80.39,245.49 v80.52,245.36 | v83.06,244.35 83.25,244.54 83.25,245.3 83.57,245.62 U52.18 87.16,245.62 C64.2 89.38,245.4 90.45,246.47 96.27,246.47
  Bottom 0.406: JP38.1 93.53,220.54 82.93,220.54 | 82.93,220.54 70.17,220.54 v69.6,219.96 | 82.93,220.54 83.06,220.66 v83.06,244.35 81.34,244.35 80.52,245.17 v80.52,245.36
12V
  Top 0.61: U2.VIN 57.34,43.37 50.04,43.37 49.72,43.05 D1.C 49.79,42.1 51.94,42.1 52.26,41.78 C4.1
12V1
  Top 0.61: U8.VIN 111.19,43.37 103.89,43.37 103.57,43.05 D6.C 103.64,42.1 105.79,42.1 106.11,41.78 C14.1
12V2
  Top 0.61: U15.VIN 57.34,113.22 50.04,113.22 49.72,112.9 D11.C 49.79,111.95 51.94,111.95 52.26,111.63 C23.1
12V3
  Top 0.61: U22.VIN 111.19,113.22 103.89,113.22 103.57,112.9 D16.C 103.64,111.95 105.79,111.95 106.11,111.63 C32.1
12V4
  Top 0.61: U29.VIN 57.34,183.07 50.04,183.07 49.72,182.75 D21.C 49.79,181.8 51.94,181.8 52.26,181.48 C41.1
12V5
  Top 0.61: U36.VIN 111.19,183.07 103.89,183.07 103.57,182.75 D26.C 103.64,181.8 105.79,181.8 106.11,181.48 C50.1
12V6
  Top 0.61: U43.VIN 57.34,252.92 50.04,252.92 49.72,252.6 D31.C 49.79,251.65 51.94,251.65 52.26,251.33 C59.1
12V7
  Top 0.61: U50.VIN 111.19,252.92 103.89,252.92 103.57,252.6 D36.C 103.64,251.65 105.79,251.65 106.11,251.33 C68.1
CAN_CS  (via drill 0.51)
  Top 0.254: U4.16 v26.23,33.53
  Bottom 0.254: U2.D10 10.35,34.8 11.62,33.53 v26.23,33.53
CAN_CS1  (via drill 0.51)
  Top 0.254: U10.16 v80.07,33.53
  Bottom 0.254: U8.D10 64.2,34.8 65.47,33.53 v80.07,33.53
CAN_CS2  (via drill 0.51)
  Top 0.254: U17.16 v26.23,103.38
  Bottom 0.254: U15.D10 10.35,104.65 11.62,103.38 v26.23,103.38
CAN_CS3  (via drill 0.51)
  Top 0.254: U24.16 v80.07,103.38
  Bottom 0.254: U22.D10 64.2,104.65 65.47,103.38 v80.07,103.38
CAN_CS4  (via drill 0.51)
  Top 0.254: U31.16 v26.23,173.23
  Bottom 0.254: U29.D10 10.35,174.5 11.62,173.23 v26.23,173.23
CAN_CS5  (via drill 0.51)
  Top 0.254: U38.16 v80.07,173.23
  Bottom 0.254: U36.D10 64.2,174.5 65.47,173.23 v80.07,173.23
CAN_CS6  (via drill 0.51)
  Top 0.254: U45.16 v26.23,243.08
  Bottom 0.254: U43.D10 10.35,244.35 11.62,243.08 v26.23,243.08
CAN_CS7  (via drill 0.51)
  Top 0.254: U52.16 v80.07,243.08
  Bottom 0.254: U50.D10 64.2,244.35 65.47,243.08 v80.07,243.08
CAN_INT  (via drill 0.51)
  Top 0.254: U4.12 v32.38,28.45 | v29.21,37.59 28.7,38.1 28.7,41.02 27.81,41.91 v27.18,41.91 | U2.D2 v13.02,56.39
  Bottom 0.254: v29.21,37.59 29.46,37.34 31.11,37.34 32.89,35.56 32.89,28.96 v32.38,28.45 | v27.18,41.91 27.18,44.96 15.75,56.39 v13.02,56.39
CAN_INT1  (via drill 0.51)
  Top 0.254: U10.12 v86.23,28.45 | v83.06,37.59 82.55,38.1 82.55,41.02 81.66,41.91 v81.03,41.91 | U8.D2 v66.86,56.39
  Bottom 0.254: v83.06,37.59 83.31,37.34 84.96,37.34 86.74,35.56 86.74,28.96 v86.23,28.45 | v81.03,41.91 81.03,44.96 69.6,56.39 v66.86,56.39
CAN_INT2  (via drill 0.51)
  Top 0.254: U17.12 v32.38,98.3 | v29.21,107.44 28.7,107.95 28.7,110.87 27.81,111.76 v27.18,111.76 | U15.D2 v13.02,126.24
  Bottom 0.254: v29.21,107.44 29.46,107.19 31.11,107.19 32.89,105.41 32.89,98.81 v32.38,98.3 | v27.18,111.76 27.18,114.81 15.75,126.24 v13.02,126.24
CAN_INT3  (via drill 0.51)
  Top 0.254: U24.12 v86.23,98.3 | v83.06,107.44 82.55,107.95 82.55,110.87 81.66,111.76 v81.03,111.76 | U22.D2 v66.86,126.24
  Bottom 0.254: v83.06,107.44 83.31,107.19 84.96,107.19 86.74,105.41 86.74,98.81 v86.23,98.3 | v81.03,111.76 81.03,114.81 69.6,126.24 v66.86,126.24
CAN_INT4  (via drill 0.51)
  Top 0.254: U31.12 v32.38,168.15 | v29.21,177.29 28.7,177.8 28.7,180.72 27.81,181.61 v27.18,181.61 | U29.D2 v13.02,196.09
  Bottom 0.254: v29.21,177.29 29.46,177.04 31.11,177.04 32.89,175.26 32.89,168.66 v32.38,168.15 | v27.18,181.61 27.18,184.66 15.75,196.09 v13.02,196.09
CAN_INT5  (via drill 0.51)
  Top 0.254: U38.12 v86.23,168.15 | v83.06,177.29 82.55,177.8 82.55,180.72 81.66,181.61 v81.03,181.61 | U36.D2 v66.86,196.09
  Bottom 0.254: v83.06,177.29 83.31,177.04 84.96,177.04 86.74,175.26 86.74,168.66 v86.23,168.15 | v81.03,181.61 81.03,184.66 69.6,196.09 v66.86,196.09
CAN_INT6  (via drill 0.51)
  Top 0.254: U45.12 v32.38,238 | v29.21,247.14 28.7,247.65 28.7,250.57 27.81,251.46 v27.18,251.46 | U43.D2 v13.02,265.94
  Bottom 0.254: v29.21,247.14 29.46,246.89 31.11,246.89 32.89,245.11 32.89,238.51 v32.38,238 | v27.18,251.46 27.18,254.51 15.75,265.94 v13.02,265.94
CAN_INT7  (via drill 0.51)
  Top 0.254: U52.12 v86.23,238 | v83.06,247.14 82.55,247.65 82.55,250.57 81.66,251.46 v81.03,251.46 | U50.D2 v66.86,265.94
  Bottom 0.254: v83.06,247.14 83.31,246.89 84.96,246.89 86.74,245.11 86.74,238.51 v86.23,238 | v81.03,251.46 81.03,254.51 69.6,265.94 v66.86,265.94
CAN_RXD  (via drill 0.51)
  Top 0.254: U5.4 27.81,35.43 27.18,34.8 v24.64,34.8 U4.2
  Bottom 0.254: TP1.P$1 v24.64,34.8
CAN_RXD1  (via drill 0.51)
  Top 0.254: U11.4 81.66,35.43 81.03,34.8 v78.49,34.8 U10.2
  Bottom 0.254: TP3.P$1 v78.49,34.8
CAN_RXD2  (via drill 0.51)
  Top 0.254: U18.4 27.81,105.28 27.18,104.65 v24.64,104.65 U17.2
  Bottom 0.254: TP5.P$1 v24.64,104.65
CAN_RXD3  (via drill 0.51)
  Top 0.254: U25.4 81.66,105.28 81.03,104.65 v78.49,104.65 U24.2
  Bottom 0.254: TP7.P$1 v78.49,104.65
CAN_RXD4  (via drill 0.51)
  Top 0.254: U32.4 27.81,175.13 27.18,174.5 v24.64,174.5 U31.2
  Bottom 0.254: TP9.P$1 v24.64,174.5
CAN_RXD5  (via drill 0.51)
  Top 0.254: U39.4 81.66,175.13 81.03,174.5 v78.49,174.5 U38.2
  Bottom 0.254: TP11.P$1 v78.49,174.5
CAN_RXD6  (via drill 0.51)
  Top 0.254: U46.4 27.81,244.98 27.18,244.35 v24.64,244.35 U45.2
  Bottom 0.254: TP13.P$1 v24.64,244.35
CAN_RXD7  (via drill 0.51)
  Top 0.254: U53.4 81.66,244.98 81.03,244.35 v78.49,244.35 U52.2
  Bottom 0.254: TP15.P$1 v78.49,244.35
CAN_TXD  (via drill 0.51)
  Top 0.254: U4.1 22.73,36.07 v23.11,35.69 | U5.1 24,38.29 v23.37,37.66
  Bottom 0.254: v23.37,37.66 23.37,35.94 v23.11,35.69 21.21,35.69 TP2.P$1
CAN_TXD1  (via drill 0.51)
  Top 0.254: U10.1 76.58,36.07 v76.96,35.69 | U11.1 77.85,38.29 v77.22,37.66
  Bottom 0.254: v77.22,37.66 77.22,35.94 v76.96,35.69 75.06,35.69 TP4.P$1
CAN_TXD2  (via drill 0.51)
  Top 0.254: U17.1 22.73,105.92 v23.11,105.54 | U18.1 24,108.14 v23.37,107.5
  Bottom 0.254: v23.37,107.5 23.37,105.79 v23.11,105.54 21.21,105.54 TP6.P$1
CAN_TXD3  (via drill 0.51)
  Top 0.254: U24.1 76.58,105.92 v76.96,105.54 | U25.1 77.85,108.14 v77.22,107.5